# EAGLE board TTR1 Gr4 - SIMON Timothée Pic Multi (EAGLE 7.6.0)
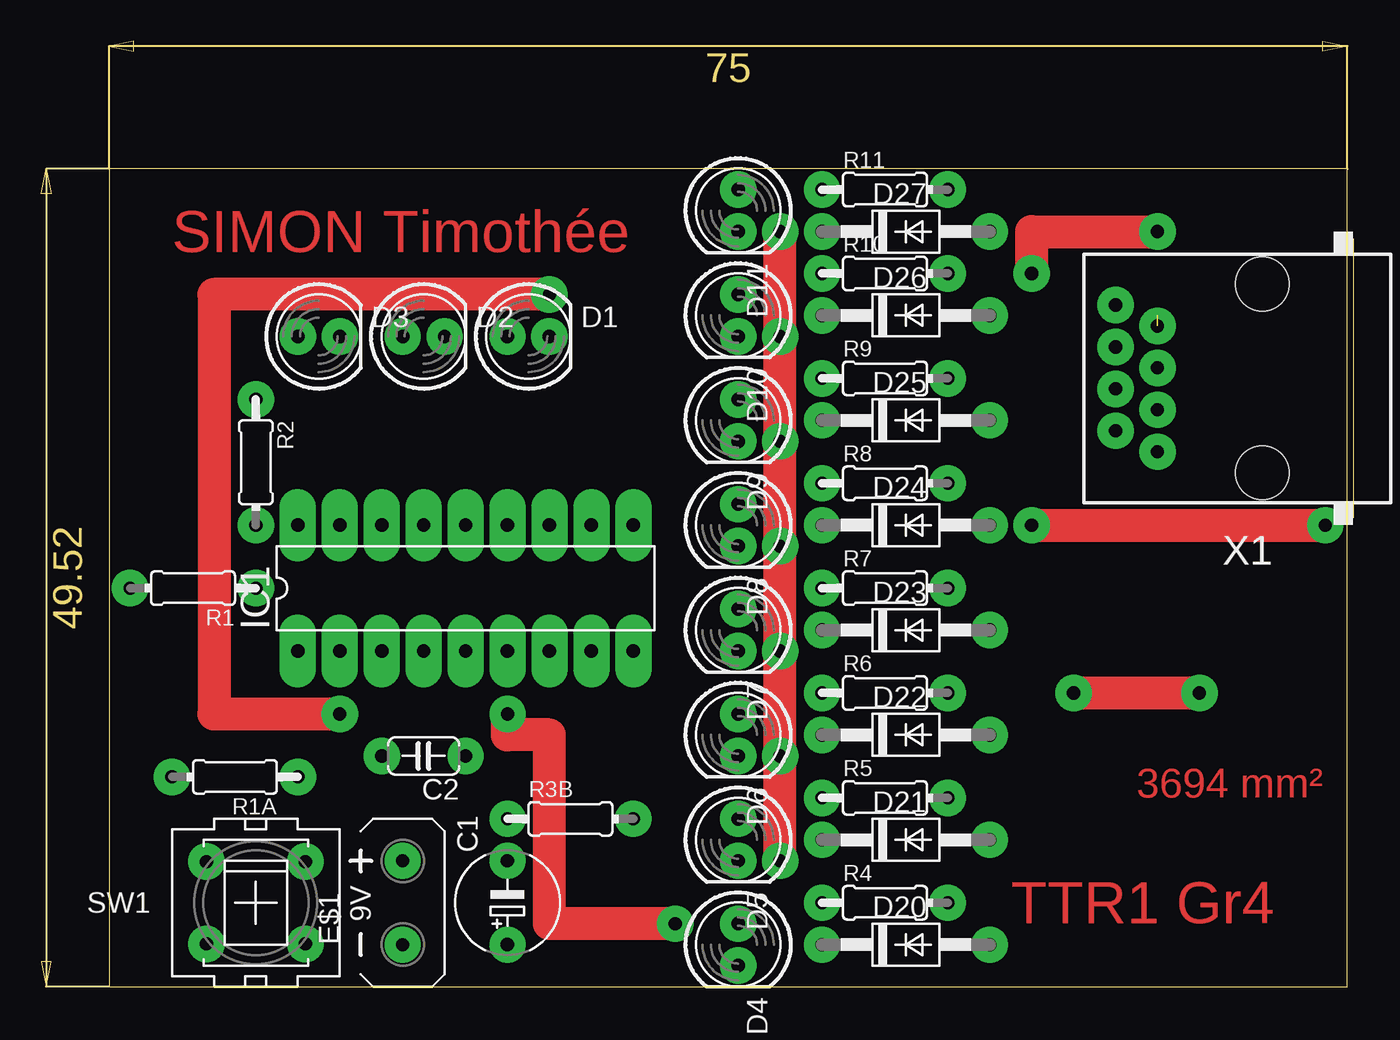
[diagram p0: board, top side]
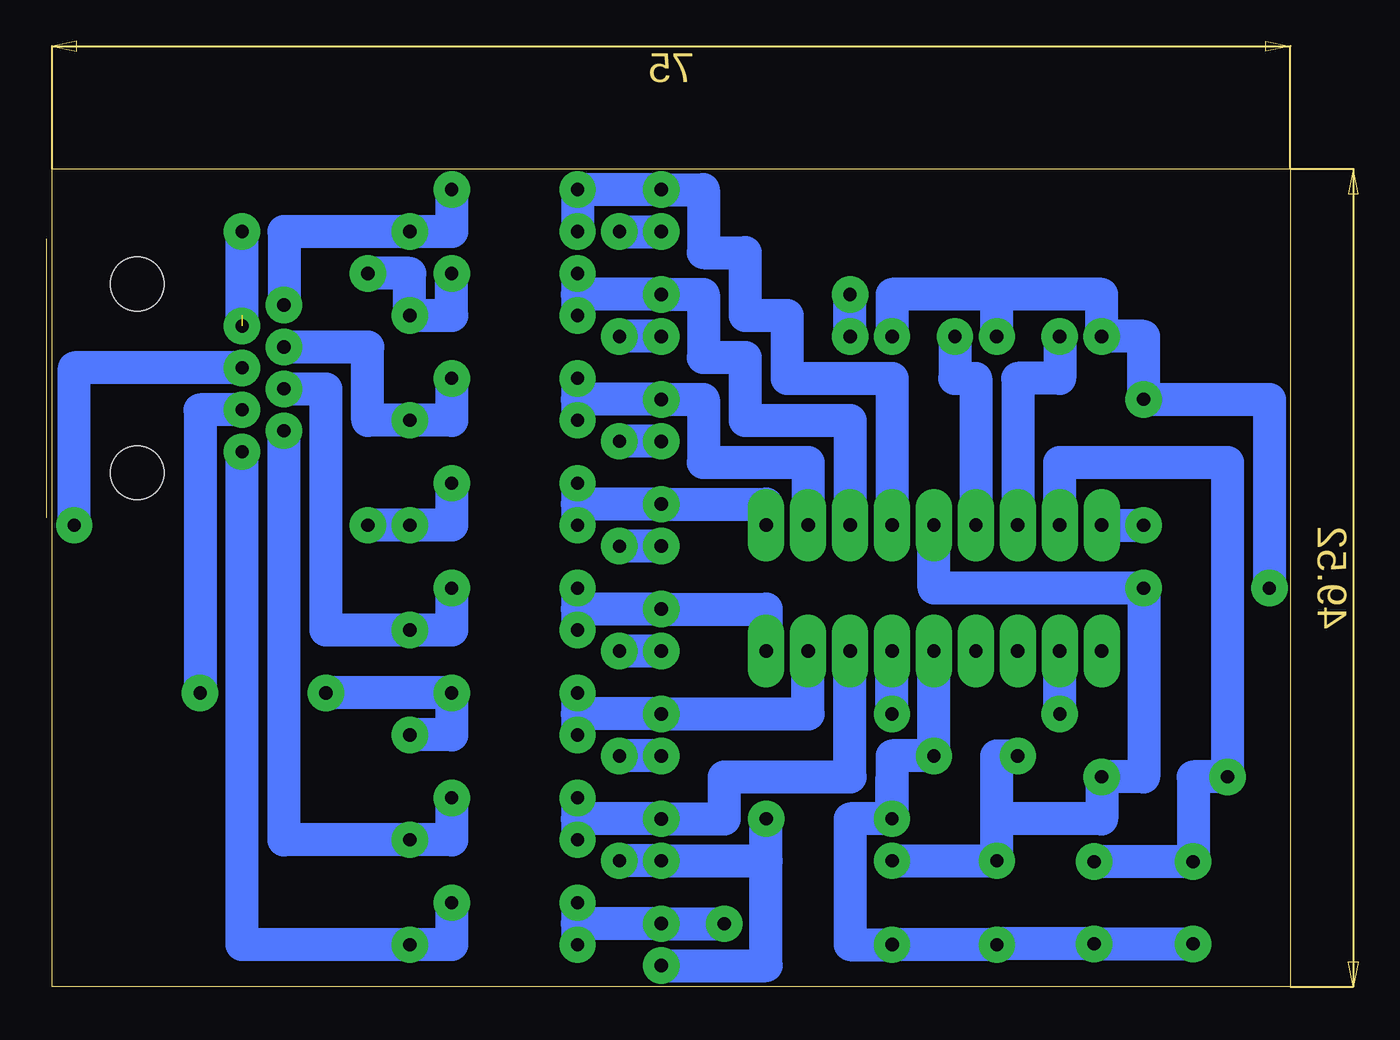
[diagram p1: board, bottom side, seen from below]

Size 75 x 49.52 mm. Coordinates in mm from the lower left corner, seen from the top.
Outline: 0,0 75,0 75,49.52 0,49.52 0,0
Copper layers (1*16): Top 0.035mm / dielectric 1.5mm / Bottom 0.035mm
Design rules "default": minimum track width 10mil, minimum drill 24mil, track to track 8mil, track to pad 8mil, pad to pad 8mil, via to via 8mil, smd to smd 8mil, copper to edge 40mil, drill to drill 8mil, minimum pad ring 10mil, minimum via ring 8mil, stop-mask expansion 4mil, vias tented up to drill 0mil, thermal gap 10mil
Net classes: 0 default: width 2 mm, drill 0.8 mm, clearance 0.2 mm

## Footprints (pad centres in the part's own frame; a part is rotated, then mirrored left to right if it is on the bottom)
E5-6 = drill 0.813 pad 2.2: + -2.54,0; - 2.54,0
C050-024X044 = drill 0.813 pad 2.2: 1 -2.54,0; 2 2.54,0
LED5MM = drill 0.813 pad 2.2: A -1.27,0; K 1.27,0
DO41-10 = drill 0.8 pad 2.2: A 5.08,0; C -5.08,0
AB9V = drill 0.8 pad 2.2: + 0,2.54; - 0,-2.54
DIL18 = drill 0.813 pad 2.2 long: 1 -10.16,-3.81; 2 -7.62,-3.81; 3 -5.08,-3.81; 4 -2.54,-3.81; 5 0,-3.81; 6 2.54,-3.81; 7 5.08,-3.81; 8 7.62,-3.81; 9 10.16,-3.81; 10 10.16,3.81; 11 7.62,3.81; 12 5.08,3.81; 13 2.54,3.81; 14 0,3.81; 15 -2.54,3.81; 16 -5.08,3.81; 17 -7.62,3.81; 18 -10.16,3.81
0204/7 = drill 0.8 pad 2.2: 1 -3.81,0; 2 3.81,0
PVA1R = drill 0.8 pad 2.2: 1 -2.997,2.489; 2 -2.997,-2.489; 3 2.997,2.489; 4 2.997,-2.489
RJ45-NO-SHIELD = drill 0.8 pad 2.2: 1 -4.445,6.35; 2 -3.175,8.89; 3 -1.905,6.35; 4 -0.635,8.89; 5 0.635,6.35; 6 1.905,8.89; 7 3.175,6.35; 8 4.445,8.89 | hole 3.251: -5.715,0; 5.715,0

## Placement (x,y rotation side)
C1  100µ  [E5-6]  24.13,5.08 90 top
C2  100n  [C050-024X044]  19.05,13.97 180 top
D1  [LED5MM]  25.4,39.37 0 top
D2  [LED5MM]  19.05,39.37 0 top
D3  [LED5MM]  12.7,39.37 0 top
D4  [LED5MM]  38.1,2.54 270 top
D5  [LED5MM]  38.1,8.89 270 top
D6  [LED5MM]  38.1,15.24 270 top
D7  [LED5MM]  38.1,21.59 270 top
D8  [LED5MM]  38.1,27.94 270 top
D9  [LED5MM]  38.1,34.29 270 top
D10  [LED5MM]  38.1,40.64 270 top
D11  [LED5MM]  38.1,46.99 270 top
D20  1N4004  [DO41-10]  48.26,2.54 0 top
D21  1N4004  [DO41-10]  48.26,8.89 0 top
D22  1N4004  [DO41-10]  48.26,15.24 0 top
D23  1N4004  [DO41-10]  48.26,21.59 0 top
D24  1N4004  [DO41-10]  48.26,27.94 0 top
D25  1N4004  [DO41-10]  48.26,34.29 0 top
D26  1N4004  [DO41-10]  48.26,40.64 0 top
D27  1N4004  [DO41-10]  48.26,45.72 0 top
E$1  [AB9V]  17.78,5.08 0 top
IC1  PIC16F627P  [DIL18]  21.59,24.13 0 top
R1  720  [0204/7]  5.08,24.13 180 top
R1A  720  [0204/7]  7.62,12.7 180 top
R2  10K  [0204/7]  8.89,31.75 270 top
R3B  720  [0204/7]  27.94,10.16 0 top
R4  [0204/7]  46.99,5.08 0 top
R5  [0204/7]  46.99,11.43 0 top
R6  [0204/7]  46.99,17.78 0 top
R7  [0204/7]  46.99,24.13 0 top
R8  [0204/7]  46.99,30.48 0 top
R9  [0204/7]  46.99,36.83 0 top
R10  [0204/7]  46.99,43.18 0 top
R11  [0204/7]  46.99,48.26 0 top
SW1  PVA1R  [PVA1R]  8.89,5.08 180 top
X1  RJ45-6L-B  [RJ45-NO-SHIELD]  69.85,36.83 90 top

## Library data of the parts
C1 C2 R1 R1A R2 R3B R4-R11 = resistor
D1-D11 = led
D20-D27 = diode
E$1 = battery
IC1 = microchip; MF: MICROCHIP; MPN: PIC16F627-20I/P; OC_FARNELL: 1084298; OC_NEWARK: 23C4967
SW1 = switch-misc
X1 = con-tycoelectronics; MPN: RJ45-6L-B; OC_FARNELL: unknown; OC_NEWARK: 16R6090

## Nets
D20: D4.A D20.C IC1.6 R4.1
GND: C1.+ C2.1 IC1.5 R3B.1 SW1.1 SW1.3
N$1: D5.A D21.C IC1.7 R5.1
N$2: D2.K IC1.15
N$3: IC1.18 R2.2
N$4: D7.A D23.C IC1.9 R7.1
N$5: IC1.17 R1A.2 SW1.2 SW1.4
N$6: D1.A D2.A D3.A R1.2 R2.1
N$7: D21.A R5.2 X1.2
N$8: D1.K IC1.2
N$9: D9.A D25.C IC1.11 R9.1
N$11: D3.K IC1.16
N$12: D6.A D22.C IC1.8 R6.1
N$13: D23.A R7.2 X1.4
N$14: D20.A R4.2 X1.1
N$15: D8.A D24.C IC1.10 R8.1
N$16: D25.A R9.2 X1.6
N$17: D26.A R10.2 X1.7
N$18: D4.K D5.K D6.K D7.K D8.K D9.K D10.K D11.K R3B.2
N$19: D24.A R8.2 X1.5
N$21: D27.A R11.2 X1.8
N$23: C1.- C2.2 IC1.14 R1.1 R1A.1
N$25: D10.A D26.C IC1.12 R10.1
N$27: D22.A R6.2 X1.3
N$29: D11.A D27.C IC1.13 R11.1

## Tracks (layer width: path | path; a pad name or v marks a point on that pad's centre or on a via)
D20  (via drill 0.8 pad 2.2)
  Top 2: v34.29,3.81 26.67,3.81 26.67,15.24 24.13,15.24 v24.13,16.51
  Bottom 2: R4.1 43.18,3.81 | 43.18,3.81 D20.C | 43.18,3.81 D4.A v34.29,3.81 | v24.13,16.51 IC1.6
GND
  Bottom 2: IC1.5 C2.1 24.13,13.97 R3B.1 | R3B.1 24.13,12.7 | SW1.3 SW1.1 17.78,2.59 17.78,2.54 C1.+ 26.67,2.54 26.67,10.16 R3B.1
N$1
  Bottom 2: R5.1 43.18,10.16 | 43.18,10.16 D21.C | 43.18,10.16 D5.A 34.29,10.16 34.29,12.7 26.67,12.7 IC1.7
N$2
  Bottom 2: D2.K 20.32,36.83 19.05,36.83 IC1.15
N$3
  Bottom 2: IC1.18 R2.2
N$4
  Bottom 2: R7.1 43.18,22.86 | 43.18,22.86 D23.C | 43.18,22.86 D7.A 31.75,22.86 IC1.9
N$5
  Bottom 2: IC1.17 13.97,31.75 3.81,31.75 R1A.2 5.89,12.7 SW1.4 SW1.2
N$6
  Bottom 2: R1.2 1.27,35.56 R2.1 8.89,39.37 D3.A 11.43,41.91 17.78,41.91 | D2.A 17.78,41.91 | 17.78,41.91 24.13,41.91 D1.A
N$7
  Bottom 2: X1.2 60.96,8.89 D21.A 50.8,8.89 R5.2
N$8  (via drill 0.8 pad 2.2)
  Top 2: v26.67,41.91 6.35,41.91 6.35,16.51 v13.97,16.51
  Bottom 2: D1.K v26.67,41.91 | v13.97,16.51 IC1.2
N$9
  Bottom 2: R9.1 43.18,35.56 | 43.18,35.56 D25.C | 43.18,35.56 D9.A 35.56,35.56 35.56,31.75 29.21,31.75 IC1.11
N$11
  Bottom 2: D3.K 13.97,36.83 16.51,36.83 IC1.16
N$12
  Bottom 2: R6.1 43.18,16.51 | 43.18,16.51 D22.C | 43.18,16.51 D6.A 29.21,16.51 IC1.8
N$13
  Bottom 2: R7.2 50.8,21.59 D23.A 58.42,21.59 58.42,36.2 X1.4
N$14
  Bottom 2: R4.2 50.8,2.54 D20.A 63.5,2.54 X1.1
N$15
  Bottom 2: R8.1 43.18,29.21 | 43.18,29.21 D24.C | 43.18,29.21 D8.A 31.75,29.21 IC1.10
N$16
  Bottom 2: R9.2 50.8,34.29 D25.A 55.88,34.29 55.88,38.73 X1.6
N$17  (via drill 0.8 pad 2.2)  (2 unrouted)
  Top 2: v55.88,43.18 55.88,45.72 v63.5,45.72
  Bottom 2: R10.2 50.8,40.64 D26.A 53.34,43.18 v55.88,43.18 | X1.7 v63.5,45.72
N$18  (via drill 0.8 pad 2.2)
  Top 2: v40.64,7.62 v40.64,13.97 v40.64,20.32 v40.64,26.67 v40.64,33.02 v40.64,39.37 v40.64,45.72
  Bottom 2: D4.K 31.75,1.27 31.75,7.62 | 31.75,7.62 R3B.2 | 31.75,7.62 D5.K v40.64,7.62 | D6.K v40.64,13.97 | D7.K v40.64,20.32 | D8.K v40.64,26.67 | D9.K v40.64,33.02 | D10.K v40.64,39.37 | v40.64,45.72 D11.K
N$19  (via drill 0.8 pad 2.2)
  Top 2: v55.88,27.94 v73.66,27.94
  Bottom 2: R8.2 50.8,27.94 D24.A v55.88,27.94 | v73.66,27.94 73.66,37.47 X1.5
N$21
  Bottom 2: R11.2 50.8,45.72 D27.A 60.96,45.72 X1.8
N$23
  Bottom 2: IC1.14 21.59,24.13 R1.1 8.89,12.7 R1A.1 11.43,10.16 17.78,10.16 | C1.- 17.78,7.62 17.78,10.16 | 17.78,10.16 17.78,13.97 C2.2
N$25
  Bottom 2: R10.1 43.18,41.91 | 43.18,41.91 D26.C | 43.18,41.91 D10.A 35.56,41.91 35.56,38.1 33.02,38.1 33.02,34.29 26.67,34.29 IC1.12
N$27  (via drill 0.8 pad 2.2)
  Top 2: v58.42,17.78 v66.04,17.78
  Bottom 2: D22.A 50.8,15.24 R6.2 v58.42,17.78 | X1.3 66.04,34.92 v66.04,17.78
N$29
  Bottom 2: D27.C R11.1 D11.A 35.56,48.26 35.56,44.45 33.02,44.45 33.02,40.64 30.48,40.64 30.48,36.83 24.13,36.83 IC1.13

## Text on the board
Top: SIMON Timothée | 3694 mm² | TTR1 Gr4